# EAGLE board PCB Capacitor (EAGLE 9.6.2)
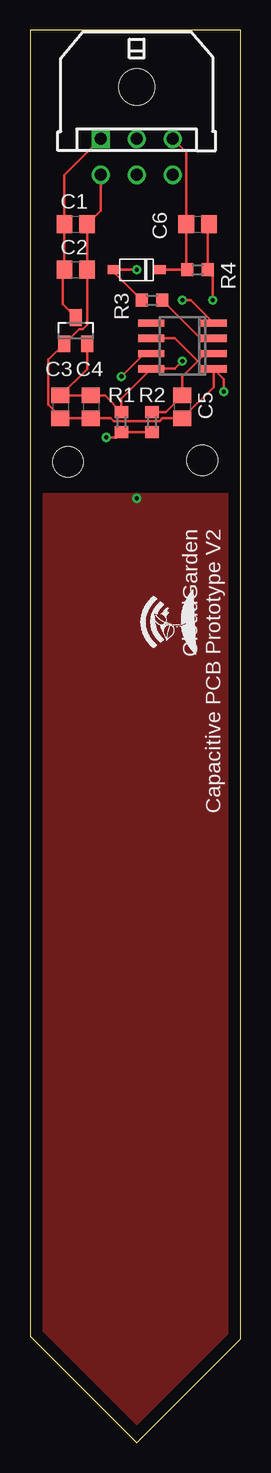
[diagram p0: board, top side]
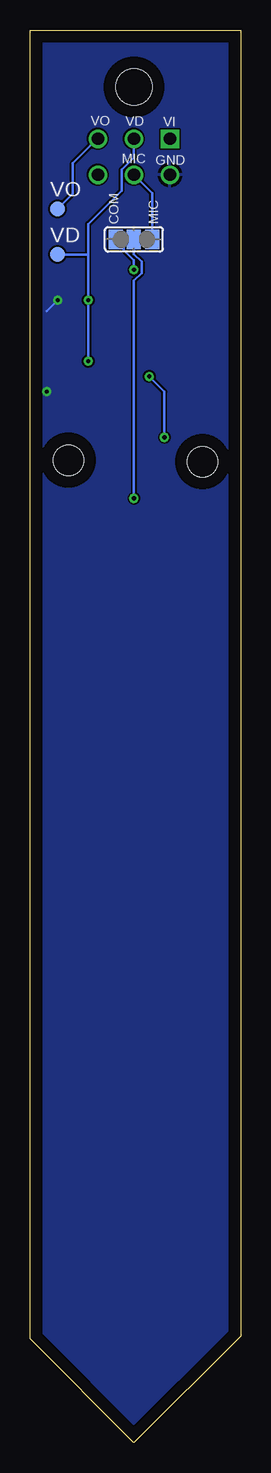
[diagram p1: board, bottom side, seen from below]

Size 17.55 x 117.78 mm. Coordinates in mm from the lower left corner, seen from the top.
Outline: 0,117.78 0,8.89 8.89,0 17.55,8.66 17.55,117.78 0,117.78
Copper layers (1*16): Top 0.035mm / dielectric 1.5mm / Bottom 0.035mm
Design rules "default": minimum track width 6mil, minimum drill 0.35mm, track to track 6mil, track to pad 6mil, pad to pad 6mil, via to via 6mil, smd to smd 6mil, copper to edge 40mil, drill to drill 6mil, minimum pad ring 10mil, minimum via ring 8mil, stop-mask expansion 4mil, vias tented up to drill 0mil, thermal gap 10mil
Holes 2.54 mm at 3.18,81.79 14.35,81.92

## Footprints (pad centres in the part's own frame; a part is rotated, then mirrored left to right if it is on the bottom)
C0805 = smd 1.3 x 1.5: 1 -0.95,0; 2 0.95,0
SOD-123 = smd 0.762 x 1.016: A 0,-1.905; C 0,1.905
SOT23 = smd 1 x 1.4: 1 -0.95,-1.1; 2 0.95,-1.1; 3 0,1.1
SO08 = smd 0.6 x 2.2: 1 -1.905,-2.6; 2 -0.635,-2.6; 3 0.635,-2.6; 4 1.905,-2.6; 5 1.905,2.6; 6 0.635,2.6; 7 -0.635,2.6; 8 -1.905,2.6
R0603 = smd 1 x 1.1: 1 -0.85,0; 2 0.85,0
SJ_2 = smd 1.168 x 1.6: 1 -1.524,0; 2 0,0; 3 1.524,0
B1,27 = smd 1.27 x 1.27: TP 0,0
43045-0600 = drill 1.02 square: P$1 3,4.32 | drill 1.02: P$2 0,4.32; P$3 -3,4.32; P$4 3,7.32; P$5 0,7.32; P$6 -3,7.32 | hole 3: 0,0

## Placement (x,y rotation side)
C1  160n  [C0805]  3.81,101.6 0 top
C2  10u  [C0805]  3.81,97.79 0 top
C3  140n  [C0805]  2.54,86.36 270 top
C4  120n  [C0805]  5.08,86.36 270 top
C5  660p  [C0805]  12.7,86.36 270 top
C6  1u  [C0805]  13.97,101.6 0 top
D11  DIODE_SCHOTTKY_CMMSH2-40  [SOD-123]  8.89,97.79 270 top
IC1  MCP1703CB  [SOT23]  3.81,92.71 0 top
IC2  NE555D  [SO08]  12.7,91.44 90 top
R1  330  [R0603]  7.62,85.09 90 top
R2  1600  [R0603]  10.16,85.09 270 top
R3  10k  [R0603]  10.16,95.25 180 top
R4  1M  [R0603]  13.97,97.79 180 top
SJ1  [SJ_2]  8.89,100.33 0 bottom
VD  TPB1,27  [B1,27]  15.24,99.06 0 bottom
VO  TPB1,27  [B1,27]  15.24,102.87 0 bottom
X1  [43045-0600]  8.89,113.03 180 top

## Library data of the parts
C1-C6 = rcl; SPICEPREFIX: C
D11 = diode
IC1 IC2 = linear
R1-R4 = rcl; SPICEPREFIX: R
SJ1 = jumper
VD VO = testpad
X1 = con-molex-micro-fit-3_0

## Nets
CAP: SJ1.2
GND: C1.2 C2.2 C3.2 C4.2 C5.2 C6.2 IC1.1 IC2.1 R4.1 X1.P$4
N$2: IC2.7 R1.1 R2.2
N$3: C5.1 IC2.2 IC2.6 R2.1
N$9: IC2.3 R3.1
NC: X1.P$6
SJCOM: D11.A R3.2 SJ1.1
SJMIC: SJ1.3 X1.P$5
VDIR: C3.1 C4.1 IC1.2 IC2.4 IC2.8 R1.2 VD.TP X1.P$2
VIN: C1.1 C2.1 IC1.3 X1.P$1
VOUT: C6.1 D11.C R4.2 VO.TP X1.P$3

## Tracks (layer width: path | path; a pad name or v marks a point on that pad's centre or on a via)
CAP  (via drill 0.35)
  Bottom 0.203: SJ1.2 8.89,99.09 8.26,98.46 8.26,97.53 8.89,96.9 v8.89,78.74
  pour Top: -1.27,79.12 19.05,79.12 19.05,-1.27 -1.27,-1.27
GND  (via drill 0.35)
  Top 0.203: X1.P$4 5.89,102.73 C1.2 C2.2 4.76,93.2 4.41,92.86 4.11,92.86 IC1.1 1.54,90.29 1.54,86.56 2.54,85.55 C3.2 C4.2 6.74,85.41 6.96,85.19 10.82,85.19 11.04,85.41 C5.2 15.3,88.01 IC2.1 16.16,88.68 v16.16,87.63 | C6.2 14.82,101.5 R4.1 15.24,97.37 v15.24,95.25
  Bottom 0.203: 16.16,94.33 v15.24,95.25
  pour Bottom: -1.27,119.38 19.05,119.38 19.05,-1.27 -1.27,-1.27
N$2  (via drill 0.35)
  Top 0.203: R2.2 R1.1 7.2,83.82 v6.35,83.82 | v7.62,88.9 9.53,90.81 IC2.7
  Bottom 0.203: v6.35,83.82 6.35,87.63 v7.62,88.9
N$3
  Top 0.203: R2.1 11.33,85.94 C5.1 12.7,88.9 13.97,90.17 | IC2.2 14.61,90.81 13.97,90.17 | IC2.6 12.07,92.08 13.97,90.17
N$9
  Top 0.203: R3.1 14.19,92.08 IC2.3
SJCOM  (via drill 0.35)
  Top 0.203: R3.2 6.99,97.58 D11.A v8.89,97.79
  Bottom 0.203: SJ1.1 9.73,99.64 9.73,99.42 8.89,98.59 v8.89,97.79
SJMIC
  Bottom 0.203: SJ1.3 7.37,104.19 X1.P$5
VDIR  (via drill 0.35)
  Top 0.203: IC1.2 4.76,89.53 C3.1 C4.1 6.25,87.31 R1.2 7.62,87.06 IC2.8 12.07,89.54 v12.7,90.17 | IC2.4 13.39,95.25 v12.7,95.25
  Bottom 0.203: v12.7,90.17 v12.7,95.25 12.7,99.06 | 12.7,99.06 12.7,101.6 9.91,104.39 9.91,106.13 8.89,107.15 X1.P$2 | VD.TP 12.7,99.06
VIN
  Top 0.203: X1.P$1 2.86,105.68 C1.1 C2.1 2.71,97.64 2.71,94.91 IC1.3
VOUT
  Top 0.203: D11.C R4.2 13.02,97.89 C6.1 13.02,107.58 X1.P$3
  Bottom 0.203: VO.TP 13.97,104.14 13.97,106.68 11.94,108.71 X1.P$3

## Text on the board
tPlace: CloudGarden / Capacitive PCB Prototype V2
bPlace: VI | VD | VO | GND | MIC
bNames: MIC | COM
200bmp: C:/Users/donov/Desktop/CloudGarden Logo.bmp